# Altium PCB Copy of SoM.PcbDoc (part 8 of 8)
Units mm, origin at the board's own origin, x right, y up, seen from the top; angles counter-clockwise.
Board outline 69.6 x 50 mm, 10 copper layers ([1] Signal HS-H, [2] GND, [3] Signal HS-V, [4] Signal H, [5] GND, [6] POWER, [7] Signal V, [8] Signal HS-H, [9] GND, [10] Signal HS-V), stack 1.146 mm thick; 537 components, 516 nets, 5689 pads, 981 vias.
Unrouted connection lines stored in the file: 963.
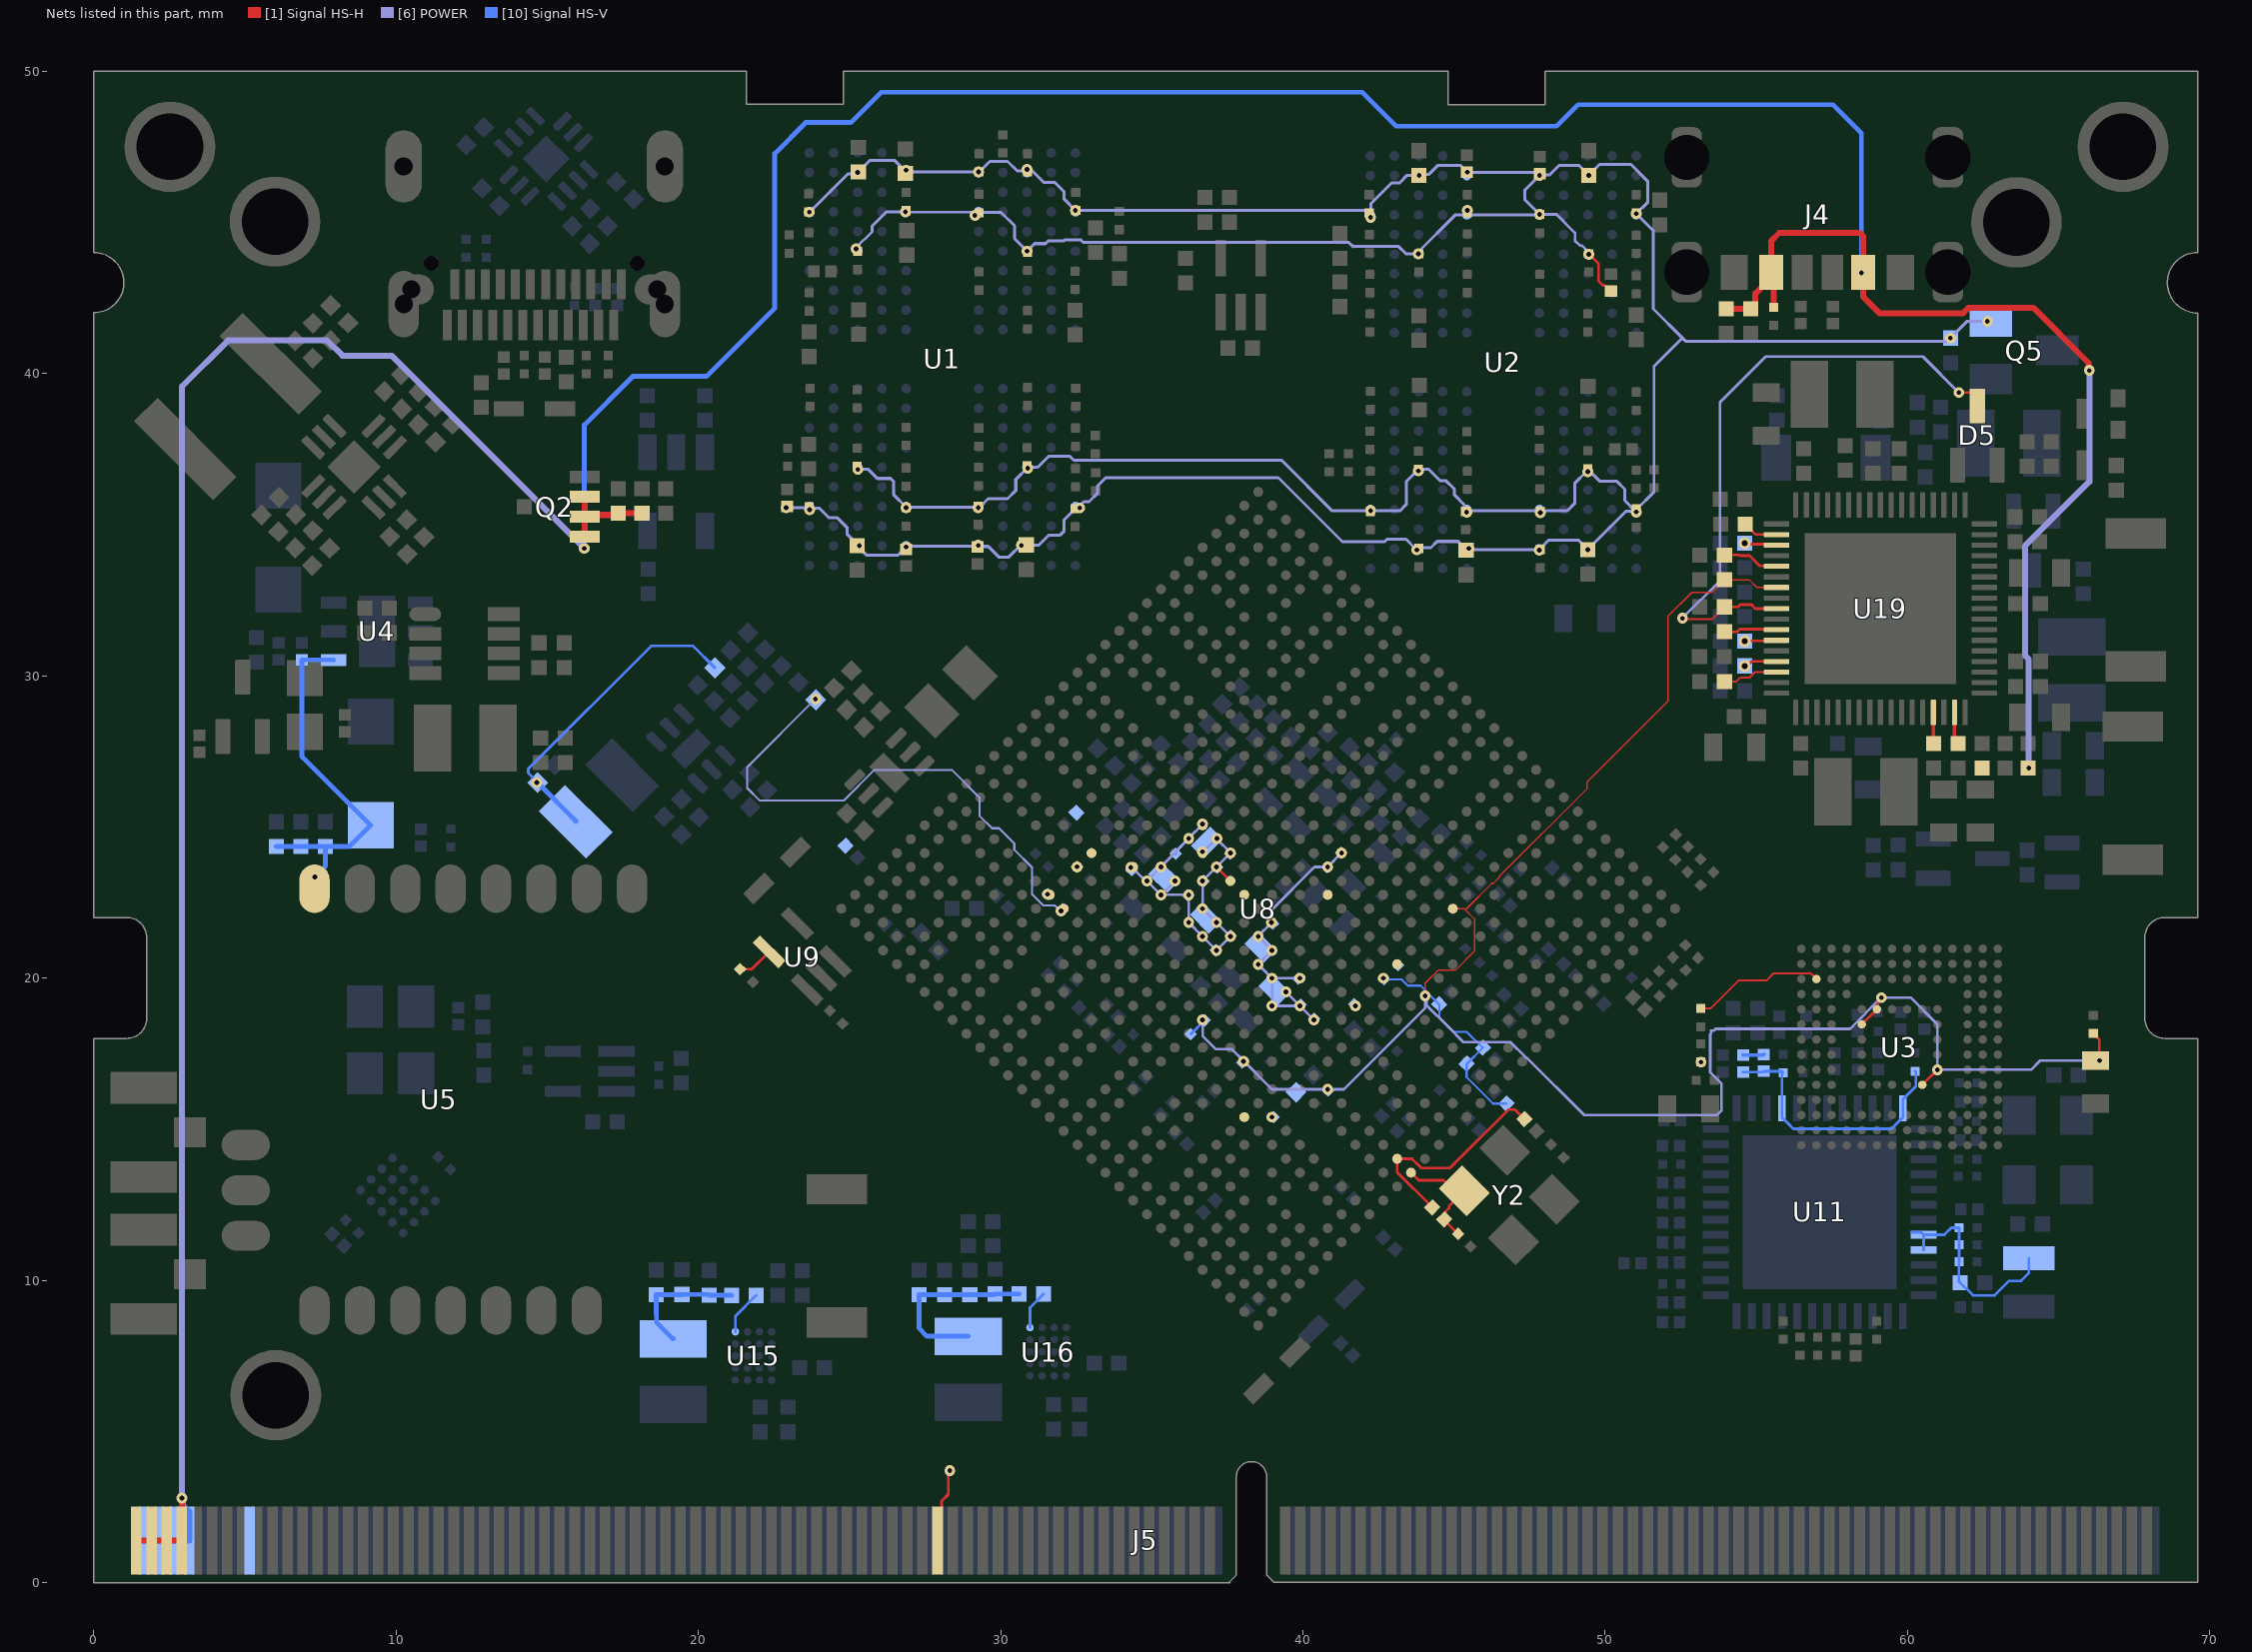
[diagram p13: the nets of this part, all layers, seen from the top]

## Via types
v1: diameter 0.36, hole 0.16, [1] Signal HS-H to [10] Signal HS-V, 895 vias
v2: diameter 0.35, hole 0.16, [1] Signal HS-H to [10] Signal HS-V, 22 vias
v3: diameter 0.4, hole 0.2, [1] Signal HS-H to [10] Signal HS-V, 13 vias
v4: diameter 0.35, hole 0.15, [1] Signal HS-H to [10] Signal HS-V, 12 vias
v5: diameter 0.35, hole 0.15, [1] Signal HS-H to [8] Signal HS-H, 11 vias
v6: diameter 0.35, hole 0.2, [1] Signal HS-H to [8] Signal HS-H, 6 vias
v7: diameter 0.5, hole 0.25, [1] Signal HS-H to [10] Signal HS-V, 6 vias
v8: diameter 0.35, hole 0.15, [3] Signal HS-V to [10] Signal HS-V, 6 vias
v9: diameter 0.35, hole 0.2, [3] Signal HS-V to [10] Signal HS-V, 4 vias
v10: diameter 0.36, hole 0.16, [1] Signal HS-H to [3] Signal HS-V, 4 vias
v11: diameter 0.5, hole 0.25, [1] Signal HS-H to [8] Signal HS-H, 2 vias

## Nets (pads, with @x,y where several pads share a name; then routed paths per layer and width w, separated by ;. In a path a pad name is that pad's centre, name@x,y a point inside that pad or via, vN(x,y) a via of type N, cw(c..) or ccw(c..) an arc to the next point about the centre after c; other vN are vias at no path point) (continued)
VCC_DDRC: C4.2 C11.2 C12.2 C13.2 C14.2 C15.2 C16.2 C17.2 C18.2 C28.2 C29.2 C30.2 C31.2 C32.2 C33.2 C34.2 C35.2 C36.2 C55.2 C56.2 C57.2 C58.2 C59.2 C60.2 C61.2 C62.2 C63.2 C73.2 C74.2 C75.2 C76.2 C77.2 C78.2 C79.2 C80.2 C81.2 C347.2 Q5.2 R1.2 R3.2 R4.2 R5.2 R7.1 R8.1 U1.AA3 U1.AA5 U1.AA8 U1.AA10 U1.B3 U1.B5 U1.B8 U1.B10 U1.D1 U1.D5 U1.D8 U1.D12 U1.F3 U1.F10 U1.U3 U1.U10 U1.W1 U1.W5 U1.W8 U1.W12 U2.AA3 U2.AA5 U2.AA8 U2.AA10 U2.B3 U2.B5 U2.B8 U2.B10 U2.D1 U2.D5 U2.D8 U2.D12 U2.F3 U2.F10 U2.U3 U2.U10 U2.W1 U2.W5 U2.W8 U2.W12 | length 148.8
  [1] Signal HS-H w0.09: C63.2@49.454,43.963 49.776,43.641 49.776,43.064 49.919,42.92 49.982,42.92 50.18,42.722 R5.2@50.19,42.722
  [6] POWER w0.09: v1(25.222,44.12) 25.222,44.168 25.747,44.693 25.747,44.876 26.221,45.35 v1(26.85,45.35) 26.858,45.342 29.293,45.342 29.302,45.333 ; v1@47.818,45.253 v1(47.828,45.263) 48.39,45.263 48.998,44.654 48.998,44.397 49.162,44.234 49.224,44.234 49.439,44.018 v1@49.454,44.018 ; v1@51.025,35.495 51.613,36.083 51.613,40.234 52.553,41.173
  [6] POWER w0.1: v1(22.911,35.56) 22.917,35.554 23.68,35.554 v1@23.696,35.538 ; v1(23.673,45.339) 23.682,45.339 24.945,46.602 25.227,46.602 v1(25.275,46.65) 25.669,47.044 26.507,47.044 v1@26.85,46.701 ; v1(23.686,35.497) 23.696,35.507 v1@23.696,35.538 ; v1@25.254,34.36 24.917,34.696 24.917,34.909 24.6,35.227 24.327,35.227 24.016,35.538 v1@23.696,35.538 ; v1(25.279,36.827) 25.627,36.827 25.926,36.528 26.362,36.528 26.467,36.424 26.467,35.987 26.873,35.581 v1(26.873,35.56) ; v1(25.33,34.305) 25.254,34.305 25.574,33.985 26.593,33.985 26.898,34.29 29.236,34.29 v1(29.261,34.315) 29.296,34.281 29.591,34.281 29.94,33.931 30.274,33.931 30.658,34.315 31.258,34.315 31.588,34.646 31.953,34.646 32.103,34.795 32.103,35.165 v1@32.492,35.554 ; v1@26.874,35.581 29.26,35.581 29.308,35.582 29.588,35.862 30.233,35.862 30.502,36.132 30.502,36.499 v1@30.905,36.902 ; v1(26.875,46.726) 26.875,46.675 26.888,46.663 v1@29.262,46.663 ; v1(29.261,35.556) v1@29.261,35.581 ; v1@29.275,46.65 29.643,47.018 30.233,47.018 30.551,46.7 v1@30.825,46.7 ; 29.302,45.333 30.013,45.333 30.458,44.888 30.458,44.467 v1(30.875,44.05) 31.123,44.298 31.486,44.298 31.585,44.396 32.1,44.396 32.131,44.428 32.646,44.428 32.741,44.332 41.52,44.332 41.656,44.196 41.662,44.202 43.164,44.202 43.403,43.963 v1(43.815,43.963) 43.815,44.028 45.029,45.242 v1@45.415,45.242 ; v1(30.875,46.752) 30.925,46.702 31.048,46.702 31.42,46.33 31.785,46.33 32.103,46.012 32.103,45.769 v1(32.471,45.4) 42.037,45.4 42.144,45.293 42.215,45.293 42.245,45.323 42.245,45.623 42.923,46.301 43.187,46.301 43.444,46.558 v1(43.84,46.558) 43.875,46.593 44.17,46.593 44.469,46.891 45.206,46.891 45.438,46.659 v1(45.441,46.659) 47.656,46.659 ; v1(30.898,36.87) 30.905,36.877 v1@30.905,36.902 ; v1(32.619,35.554) 32.619,35.624 32.752,35.758 32.752,35.76 32.925,35.76 33.201,36.036 33.201,36.275 33.477,36.551 39.192,36.551 41.303,34.439 42.705,34.439 42.784,34.519 42.85,34.519 43.409,34.519 43.688,34.24 v1@43.84,34.24 ; v1(43.764,34.164) v1@43.84,34.24 ; v1@43.797,36.802 43.416,36.421 43.416,35.669 43.205,35.458 v1(42.24,35.458) 40.97,35.458 39.295,37.133 32.422,37.133 32.291,37.265 31.591,37.265 31.228,36.902 v1@30.905,36.902 ; v1(43.822,36.776) 43.822,36.827 44.164,36.827 44.542,36.449 44.739,36.449 45.012,36.176 45.012,35.979 45.34,35.651 45.34,35.483 v1@45.39,35.433 ; v1(45.415,35.408) v1@45.39,35.433 ; v1@45.425,45.253 v1@47.818,45.253 ; v1(45.491,34.214) 45.475,34.197 v1@45.475,34.172 ; v1(47.822,34.156) 47.822,34.163 v1@47.813,34.172 ; v1(47.828,45.263) 47.346,45.745 47.346,46.075 v1(47.828,46.558) 47.838,46.568 48.158,46.568 48.482,46.891 49.121,46.891 v1(49.454,46.558) 49.812,46.917 50.848,46.917 51.413,46.352 51.413,45.672 v1(51.029,45.288) 51.587,44.73 51.587,42.139 52.553,41.173 52.654,41.072 61.316,41.072 v1(61.417,41.173) 61.976,41.732 v1(62.636,41.732) ; v1(47.848,35.397) v1@47.848,35.466 ; v1(49.424,36.751) 49.373,36.751 48.985,36.363 48.985,35.701 48.75,35.466 v1@47.848,35.466 ; v1@49.474,36.752 49.493,36.752 49.586,36.659 49.599,36.659 49.826,36.432 50.384,36.432 50.641,36.175 50.641,35.803 v1@50.987,35.457 ; v1(51.025,35.419) v1@50.987,35.457 ; v1@43.84,34.24 44.233,34.24 44.439,34.445 45.133,34.445 45.415,34.163 45.466,34.163 v1@45.475,34.172 ; v1@45.39,35.433 45.422,35.466 v1@47.848,35.466 ; v1@45.475,34.172 v1@47.813,34.172 ; v1@47.813,34.172 48.134,34.493 49.108,34.493 v1(49.424,34.178) 50.695,35.449 50.98,35.449 v1@50.987,35.457
  other v1: 26.873,34.265 30.683,34.315 49.454,43.942 42.24,45.166 29.149,45.232 45.441,45.395 29.275,46.675
VCC_EFUSE: C186.2 U8.AD23 U9.5 | length 1.2
  [1] Signal HS-H w0.09: C186.2@21.385,20.294 21.765,20.294 U9.5@22.344,20.873
VCC_GPU: C127.2 C128.2 C129.2 C130.2 C131.2 C132.2 C133.2 C134.2 C135.2 C136.2 C137.2 U8.R11 U8.R12 U8.R13 U8.T11 U8.T12 U8.T13 U8.T14 U8.U13 U8.V11 U8.V12 U8.V13 U8.V14 U8.V15 U8.V16 U8.W10 U8.W11 U8.W12 U8.W14 U8.W15 U8.W16 | length 14.6
  [1] Signal HS-H w0.09: v1(37.141,23.675) U8.T14@37.601,23.215
  [6] POWER w0.09: v1(34.306,23.663) 34.351,23.663 34.798,23.215 v1(34.843,23.215) ; v1(35.762,23.215) v1(35.303,22.756) ; v1(36.678,24.181) 36.703,24.181 37.116,24.594 37.16,24.594 37.601,24.153 v1(37.601,24.135) v1(37.141,23.675) v1(36.682,23.215) v1(36.682,22.296) v1(37.141,21.836) v1(37.601,21.377) v1(37.141,20.917) v1(36.682,21.377) v1(36.222,21.836) v1(36.222,22.756) v1(35.303,22.756) ; v1@36.678,25.082 36.22,24.625 v1(36.22,24.613) 36.22,24.603 35.303,23.685 v1(35.303,23.675) v1(34.843,23.215) ; v1(34.843,23.215) v1(35.303,22.756)
  [10] Signal HS-V w0.09: C130.2@35.788,24.114 35.788,24.18 v1(36.22,24.613)
  other v1: 37.16,24.613 36.678,25.095
VCC_IN_CONN: C276.1 C277.2 C278.2 C279.2 J4.A9 J4.B9 J5.1 J5.2 J5.3 J5.4 J5.5 J5.6 J5.7 J5.8 Q2.1 Q2.2 Q2.3 R97.1 R129.2 | length 154.7
  [1] Signal HS-H w0.2: J5.1@1.415,1.397 J5.3@1.915,1.397 J5.5@2.415,1.397 J5.7@2.915,1.397 2.918,1.4 2.918,2.791 v1(2.921,2.794) ; Q2.1@16.239,34.601 Q2.2@16.239,35.261 ; Q2.3@16.239,35.921 Q2.2@16.239,35.261 ; R97.1@18.136,35.382 C276.1@17.348,35.382 17.288,35.322 16.299,35.322 Q2.2@16.239,35.261 ; C277.2@54,42.139 C278.2@54.813,42.139 54.963,42.289 54.963,42.645 55.493,43.175 55.575,43.093 C279.2@55.575,42.194 ; J4.A9@55.493,43.35 55.493,44.393 55.753,44.653 58.416,44.653 58.533,44.536 J4.B9@58.533,43.35 ; v1(58.471,43.332) 58.516,43.332 J4.B9@58.533,43.35 ; v5(66.015,40.107) 65.986,40.135 65.986,40.35 64.17,42.166 62.004,42.166 61.833,41.996 59.071,41.996 58.533,42.533 J4.B9@58.533,43.35
  [6] POWER w0.2: v1(2.921,2.794) 2.921,39.573 4.445,41.097 7.722,41.097 8.23,40.589 9.855,40.589 v1(16.231,34.214) ; v1(64.008,26.949) 64.008,30.55 63.879,30.679 63.879,34.29 66.015,36.426 v5(66.015,40.107)
  [10] Signal HS-V w0.16: v1(16.231,34.214) 16.231,38.303 17.831,39.903 20.269,39.903 22.53,42.164 22.53,47.279 23.552,48.302 25.047,48.302 26.052,49.307 41.956,49.307 43.078,48.184 48.387,48.184 49.098,48.895 57.531,48.895 58.471,47.955 v1(58.471,43.332)
  [10] Signal HS-V w0.2: J5.2@1.665,1.397 J5.4@2.165,1.397 J5.6@2.665,1.397 J5.8@3.165,1.397 3.165,2.347 2.952,2.56 2.952,2.763 v1(2.921,2.794)
VCC_LOG: C138.2 C139.2 C140.2 C141.2 C142.2 C143.2 C144.2 C145.2 U8.L17 U8.M17 U8.T17 U8.U17 U8.U18 U8.U20 U8.V18 U8.V19 U8.V20 U8.V21 U8.V22 U8.W20 | length 10.2
  [6] POWER w0.09: v1(39.439,19.538) v1(39.899,19.079) ; v1(39.899,19.998) v1(38.98,19.998) ; v1(40.359,18.619) v1(39.899,19.079) ; v1(41.278,24.135) v1(40.818,23.675) 40.384,23.675 38.954,22.245 v1(38.954,21.836) 38.954,21.824 38.52,21.389 v1(38.52,21.377) v1(38.98,20.917) v1(38.52,20.458) v1(38.98,19.998) ; v1(38.98,19.998) v1(38.98,19.079) v1(39.899,19.079)
VCC_RTC: C340.2 D5.K U19.9 | length 21
  [1] Signal HS-H w0.07: v1(52.553,31.902) 52.586,31.869 53.529,31.869 C340.2@53.941,32.281
  [1] Signal HS-H w0.09: C340.2@53.941,32.281 54.399,32.281 54.47,32.352 54.837,32.352 54.965,32.224 U19.9@55.667,32.224 ; v1(61.697,39.37) 62.101,39.37 62.306,39.165 D5.K@62.306,38.928
  [6] POWER w0.09: v1(52.553,31.902) 53.797,33.147 53.797,39.057 55.302,40.562 60.505,40.562 v1(61.697,39.37)
VCC_WIFI: C91.1 C93.2 C94.2 C95.2 R11.2 U4.4 U5.15 | length 12
  [10] Signal HS-V w0.16: C94.2@6.045,24.359 C95.2@6.858,24.359 C93.2@7.671,24.359 ; v1(7.315,23.343) 7.671,23.698 C93.2@7.671,24.359 ; U4.4@7.938,30.521 7.933,30.525 6.888,30.525 R11.2@6.883,30.53 6.883,27.338 C91.1@9.164,25.057 8.466,24.359 C93.2@7.671,24.359
VCCA_1V8: C194.2 FB10.2 U8.AC24
  other v1: 38.98,15.402
VDC_ONOFF: J5.16 R127.2
VDD1V_RGMII: R77.1 R78.1 | length 0.7
  [10] Signal HS-V w0.12: R78.1@54.559,17.45 55.22,17.45 R77.1@55.245,17.476
VDD_CPU_B: C295.2 C296.2 C297.2 C298.2 L5.2 R108.2 | length 6.2
  [10] Signal HS-V w0.16: L5.2@28.931,8.151 27.561,8.151 27.305,8.407 C298.2@27.305,9.525 C297.2@28.143,9.525 C296.2@28.981,9.525 29.794,9.525 C295.2@29.82,9.55 R108.2@30.607,9.55
VDD_CPU_B_FB: R108.1 U8.N18 U16.A4 | length 1.3
  [10] Signal HS-V w0.09: U16.A4@30.972,8.439 30.972,9.102 R108.1@31.42,9.55
VDD_GPU: C292.2 C293.2 C294.2 L4.2 R107.2 | length 4.2
  [10] Signal HS-V w0.16: L4.2@19.176,8.069 19.158,8.069 18.618,8.609 18.618,8.89 18.612,8.896 C293.2@18.612,9.53 19.452,9.53 C292.2@19.458,9.536 20.339,9.536 C294.2@20.362,9.513 21.092,9.513 R107.2@21.103,9.502
VDD_GPU_FB: R107.1 U8.T15 U15.A4 | length 1.5
  [10] Signal HS-V w0.09: U15.A4@21.228,8.301 21.228,8.815 R107.1@21.916,9.502
VDD_LOG: C304.2 L6.2 R110.2 | length 10.6
  [10] Signal HS-V w0.09: C304.2@14.689,26.469 14.376,26.781 14.376,26.924 18.44,30.988 19.827,30.988 R110.2@20.551,30.264
  [10] Signal HS-V w0.16: C304.2@14.689,26.469 15.946,25.212 L6.2@15.946,25.174
  other v1: 14.656,26.467
VDDI_FM: C110.2 U3.C2 | length 4.4
  [1] Signal HS-H w0.07: C110.2@53.163,18.992 53.484,18.992 54.42,19.929 55.343,19.929 55.568,20.154 56.799,20.154 U3.C2@56.984,19.969
VDDREG: C248.2 C249.2 C259.2 C260.2 C261.2 C262.2 L1.2 R77.2 R78.2 U11.28 U11.36 U11.44 U11.45 | length 16.1
  [10] Signal HS-V w0.09: R78.2@54.559,16.89 55.22,16.89 R77.2@55.245,16.916 55.835,16.916 C248.2@55.88,16.87 55.844,16.835 U11.28@55.844,15.692 55.844,15.392 56.042,15.194 56.042,15.191 56.222,15.011 59.467,15.011 59.646,15.191 59.646,15.194 59.844,15.392 U11.36@59.844,15.692 59.844,15.992 60.274,16.422 60.274,16.896 C249.2@60.249,16.921 ; U11.44@60.141,11.592 60.444,11.592 U11.44@60.529,11.507 ; U11.45@60.529,11.007 U11.44@60.529,11.507 ; L1.2@64.008,10.731 64.008,10.236 63.754,9.982 63.355,9.982 62.877,9.504 62.165,9.504 C261.2@61.743,9.926 61.697,9.972 C262.2@61.697,10.612 61.701,10.616 C260.2@61.701,11.176 C259.2@61.701,11.739 61.447,11.739 61.215,11.507 U11.44@60.529,11.507
VLDO1: C313.2 J5.107 U19.31 | length 3.5
  [1] Signal HS-H w0.09: J5.107@27.915,1.397 28.045,1.527 28.045,2.696 28.27,2.921 28.27,3.658 v1(28.321,3.708)
  [1] Signal HS-H w0.12: U19.31@60.852,28.789 60.852,27.769 C313.2@60.858,27.762
VLDO2: C314.2 U19.33 | length 1.1
  [1] Signal HS-H w0.12: U19.33@61.552,28.789 61.552,27.882 C314.2@61.671,27.762
VLDO3: C315.2 U19.3 | length 1.1
  [1] Signal HS-H w0.09: v3(54.61,34.392) 54.644,34.358 55.633,34.358 U19.3@55.667,34.324
VLDO4: C190.2 C324.2 U8.T23 U19.12 | length 1.1
  [1] Signal HS-H w0.09: v3(54.618,31.143) 54.634,31.158 55.651,31.158 U19.12@55.667,31.174
  other v1: 41.737,19.079
VLDO5: C325.2 U19.14 | length 1.1
  [1] Signal HS-H w0.09: v3(54.61,30.328) 54.694,30.328 54.84,30.474 U19.14@55.667,30.474
VLDO6: C223.2 C230.2 C326.2 U8.AC8 U8.N23 U19.2 | length 1.2
  [1] Signal HS-H w0.09: C326.2@54.633,35.022 54.981,34.674 U19.2@55.667,34.674
  other v1: 31.556,22.775
VLDO7: C228.2 C316.2 R61.2 R62.2 U8.AA8 U8.Y8 U19.5 | length 1.9
  [1] Signal HS-H w0.09: C316.2@53.941,33.996 54.442,33.996 54.466,33.971 54.775,33.971 55.112,33.635 55.655,33.635 U19.5@55.667,33.624
  other v1: 32.528,23.682
VLDO8: C224.2 C229.2 C327.2 R57.2 R58.2 R59.2 R60.2 R119.1 U8.AC9 U8.P23 U19.15 | length 27
  [1] Signal HS-H w0.07: C327.2@53.941,29.805 54.324,29.805 54.458,29.939 54.766,29.939 54.786,29.959 54.791,29.959 54.956,30.124 U19.15@55.667,30.124
  [6] POWER w0.07: v1(23.876,29.235) 21.615,26.975 21.615,26.289 22.035,25.869 24.808,25.869 25.825,26.887 26.582,26.887 28.384,26.887 29.298,25.972 29.298,25.374 29.716,24.956 29.947,24.956 30.451,24.452 30.451,24.246 31.039,23.659 31.039,22.77 31.403,22.406 31.782,22.406 31.963,22.225 v1(32.004,22.225)
  [10] Signal HS-V w0.07: C229.2@42.678,19.963 43.258,19.963 43.471,19.749 43.888,19.749 R58.2@44.506,19.131 44.513,19.124 44.513,18.694 44.985,18.222 45.415,18.222 45.939,17.699 R57.2@45.954,17.699 R59.2@45.42,17.165 ; R59.2@45.413,17.158 45.413,16.719 46.285,15.848 46.724,15.848 R60.2@46.731,15.855
  other v1: 42.657,19.998
VSOUT1: C100.2 C101.2 C102.2 C212.2 C215.2 C218.2 C226.2 C337.2 U3.E6 U3.F5 U3.J10 U3.K9 U8.AB18 U8.AB21 U8.J23 U8.Y25 U19.7 | length 64.5
  [1] Signal HS-H w0.05: v5(44.044,19.411) 44.044,19.829 44.472,20.258 45.038,20.258 45.672,20.892 45.672,21.96 45.336,22.296 U8.J23@44.955,22.296 ; 45.426,22.296 45.412,22.296 46.246,23.13 46.295,23.13 46.5,23.335 46.5,23.37 49.389,26.259 49.389,26.478 52.07,29.159 52.07,31.966 52.865,32.761 53.519,32.761 C337.2@53.941,33.183 53.959,33.165 54.775,33.165 55.017,32.924 U19.7@55.667,32.924
  [1] Signal HS-H w0.09: U3.F5@58.484,18.469 59.02,19.005 59.02,19.173 59.131,19.284 v5(59.131,19.355) ; U3.K9@60.484,16.469 v1(60.984,16.969) ; C101.2@66.142,18.166 66.345,17.963 v1(66.345,17.272)
  [6] POWER w0.09: v1(36.682,18.619) 36.682,18.083 37.118,17.647 37.654,17.647 38.048,17.253 38.98,16.321 v1(40.818,16.321) 41.354,16.321 44.044,19.01 v5(44.044,19.411) 44.091,19.363 44.091,19.101 44.803,18.39 45.311,17.882 46.863,17.882 47.371,17.374 47.394,17.374 49.297,15.471 53.698,15.471 53.846,15.619 53.846,16.5 53.469,16.877 53.469,18.135 53.493,18.16 53.493,18.261 53.496,18.264 53.595,18.264 53.65,18.318 58.095,18.318 v5(59.131,19.355) 60.096,19.355 60.984,18.467 v1(60.984,16.969) 64.086,16.969 64.389,17.272 v1(66.345,17.272)
  [10] Signal HS-V w0.09: C226.2@36.288,18.145 C218.2@36.746,18.603
  other v1: 38.035,17.24
  other v5: 53.162,17.226
VSOUT2: C338.2 U19.11 | length 1.8
  [1] Signal HS-H w0.09: C338.2@53.941,31.456 54.367,31.456 54.453,31.542 55.649,31.542 U19.11@55.667,31.524
XIN_OSC_RK3399: C179.2 R21.2 U8.Y31 Y2.1 | length 3.9
  [1] Signal HS-H w0.09: U8.Y31@43.576,13.563 43.83,13.31 44.649,13.31 44.993,12.965 Y2.1@45.34,12.965 44.832,12.457 44.832,12.383 44.673,12.224 R21.2@44.673,12.019 44.673,11.994 C179.2@45.127,11.541
XOUT_OSC_RK3399: R21.1 R23.2 U8.Y30 | length 7.4
  [1] Signal HS-H w0.09: R21.1@44.277,12.415 43.116,13.576 U8.Y30@43.116,14.023 43.61,14.023 43.917,13.716 44.856,13.716 46.787,15.646 47.015,15.646 R23.2@47.325,15.336
pads on no net: J3. J5.34 J5.36 J5.37 J5.38 J5.39 J5.40 J5.41 J5.42 J5.43 J5.44 J5.45 J5.46 J5.47 J5.48 J5.94 U1. U1.A1 U1.A2 U1.A11 U1.A12 U1.AA1 U1.AA12 U1.AB1 U1.AB2 U1.AB11 U1.AB12 U1.B1 U1.B12 U1.G11 U1.H10 U1.K5 U1.K8 U1.N5 U1.N8 U1.R10 U1.T11 U1.U2 U1.Y2 U2.A1 U2.A2 U2.A11 U2.A12 U2.AA1 U2.AA2 U2.AA12 U2.AB1 U2.AB2 U2.AB11 U2.AB12 U2.B1 U2.B12 U2.G11 U2.H2 U2.J2 U2.K5 U2.K8 U2.N5 U2.N8 U2.P2 U2.R2 U2.Y2 U3.A1 U3.A2 U3.A7 U3.A8 U3.A9 U3.A10 U3.A11 U3.A12 U3.A13 U3.A14 U3.B1 U3.B7 U3.B8 U3.B9 U3.B10 U3.B11 U3.B12 U3.B13 U3.B14 U3.C1 U3.C3 U3.C5 U3.C7 U3.C8 U3.C9 U3.C10 U3.C11 U3.C12 U3.C13 U3.C14 U3.D1 U3.D2 U3.D3 U3.D4 U3.D12 U3.D13 U3.D14 U3.E1 U3.E2 U3.E3 U3.E5 U3.E8 U3.E9 U3.E10 U3.E12 U3.E13 U3.E14 U3.F1 U3.F2 U3.F3 U3.F10 U3.F12 U3.F13 U3.F14 U3.G1 U3.G2 U3.G3 U3.G10 U3.G12 U3.G13 U3.G14 U3.H1 U3.H2 U3.H3 U3.H12 U3.H13 U3.H14 U3.J1 U3.J2 U3.J3 U3.J12 U3.J13 U3.J14 U3.K1 U3.K2 U3.K3 U3.K6 U3.K7 U3.K10 U3.K12 U3.K13 U3.K14 U3.L1 U3.L2 U3.L3 U3.L12 U3.L13 U3.L14 U3.M1 U3.M2 U3.M3 U3.M7 U3.M8 U3.M9 U3.M10 U3.M11 U3.M12 U3.M13 U3.M14 U3.N1 U3.N3 U3.N6 U3.N7 U3.N8 U3.N9 U3.N10 U3.N11 U3.N12 U3.N13 U3.N14 U3.P1 U3.P2 U3.P7 U3.P8 U3.P9 U3.P10 U3.P11 U3.P12 U3.P13 U3.P14 U4.3 U5.11 U6.D2 U6.D3 U6.E2 U6.E3 U7.4 U8.A3 U8.A4 U8.A6 U8.A7 U8.A10 U8.A19 U8.AA19 U8.AA20 U8.AA22 U8.AA24 U8.AA25 U8.AB20 U8.AB22 U8.AB24 U8.AC12 U8.AC14 U8.AC19 U8.AD11 U8.AD12 U8.AD14 U8.AD15 U8.AD18 U8.AD19 U8.AD20 U8.AD24 U8.AD25 U8.AE9 U8.AE18 U8.AE20 U8.AE26 U8.AF21 U8.AG8 U8.AH8 U8.AH18 U8.AH20 U8.AH21 U8.AH27 U8.AJ30 U8.AJ31 U8.AL5 U8.AL30 U8.B2 U8.B4 U8.B6 U8.B7 U8.B10 U8.B19 U8.C1 U8.C3 U8.C4 U8.C5 U8.C6 U8.D1 U8.D2 U8.D3 U8.D6 U8.D11 U8.D12 U8.E3 U8.E11 U8.F3 U8.F4 U8.F7 U8.F9 U8.F14 U8.F17 U8.F28 U8.F29 U8.F30 U8.F31 U8.G2 U8.G6 U8.G8 U8.G14 U8.G17 U8.G20 U8.H6 U8.H7 U8.H21 U8.H24 U8.H27 U8.H29 U8.H30 U8.J1 U8.J2 U8.K1 U8.K2 U8.L4 U8.L5 U8.L7 U8.L25 U8.L26 U8.L30 U8.M4 U8.M31 U8.N24 U8.N31 U8.R25 U8.R27 U8.R28 U8.R29 U8.T31 U8.U2 U8.U6 U8.U7 U8.U30 U8.V2 U8.V6 U8.V7 U8.V30 U8.V31 U8.W31 U9.4 U10.3 U10.8 U11.12 U12.1 U13.4 U13.13 U14.4 U17.1 U18.1 U19.47 U19.48 U19.54 U19.67

## Silkscreen, mask and mechanical layers (free items; w line width, h text height)
Mechanical 1:
  lines w0.1: 0.001,42.016 ccw(c0.008,43.008) 0.008,44 ; 1.101,18.004 ccw(c1.101,18.654) 1.751,18.654 ; 1.101,22.004 cw(c1.101,21.354) 1.751,21.354 ; 37.801,3.504 cw(c38.301,3.504) 38.301,4.004 cw(c38.301,3.504) 38.801,3.504 ; 67.851,18.654 ccw(c68.501,18.654) 68.501,18.004 ; 67.851,21.354 cw(c68.501,21.354) 68.501,22.004 ; 69.589,44.002 ccw(c69.589,43.004) 69.601,42.006
Mechanical 6:
  lines w0.013: 4.115,7.65 cw(c5.55,6.894) 4.979,8.412 ; 64.618,42.778 ccw(c64.048,44.295) 65.482,43.54 ; 64.644,48.594 cw(c65.837,48.35) 65.279,49.433 ; 64.669,8.361 cw(c64.098,6.844) 65.533,7.599
Mechanical 7:
  lines w0.013: 5.004,9.174 ccw(c6.032,9.159) 6.02,8.132 cw(c5.995,6.151) 5.97,4.17 ; 63.602,48.975 cw(c63.578,47.985) 63.602,46.994 ccw(c63.588,45) 63.602,43.006 cw(c63.591,42.005) 64.593,41.99 ; 63.628,4.195 cw(c63.602,6.176) 63.577,8.158 ccw(c63.566,9.185) 64.593,9.199
Mechanical 8:
  lines w0.013: 0.001,49.004 cw(c1.001,48.999) 0.001,49.014

## Text inside footprints (layer, text, board x,y; h text height)
C96: Bottom Overlay "+" at 7.315,33.147 h0.4 r180
DS1: Top Overlay "A" at 6.81,27.045 h0.4 r270; Top Overlay "K" at 6.735,31.757 h0.4 r270
J5: [1] Signal HS-H "1" at 1.204,3.769 h0.4
U12: Top Overlay "1" at 9.941,31.724 h0.4